# Altium PCB PCB1.PcbDoc
Units mm, origin at the board's own origin, x right, y up, seen from the top; angles counter-clockwise.
Board outline 152.4 x 101.6 mm, 6 copper layers (Top Layer, Signal Layer 1, Signal Layer 2, Signal Layer 3, Signal Layer 4, Bottom Layer), stack 3.691 mm thick; 15 components, 57 nets, 446 pads, 0 vias.
Unrouted connection lines stored in the file: 109.
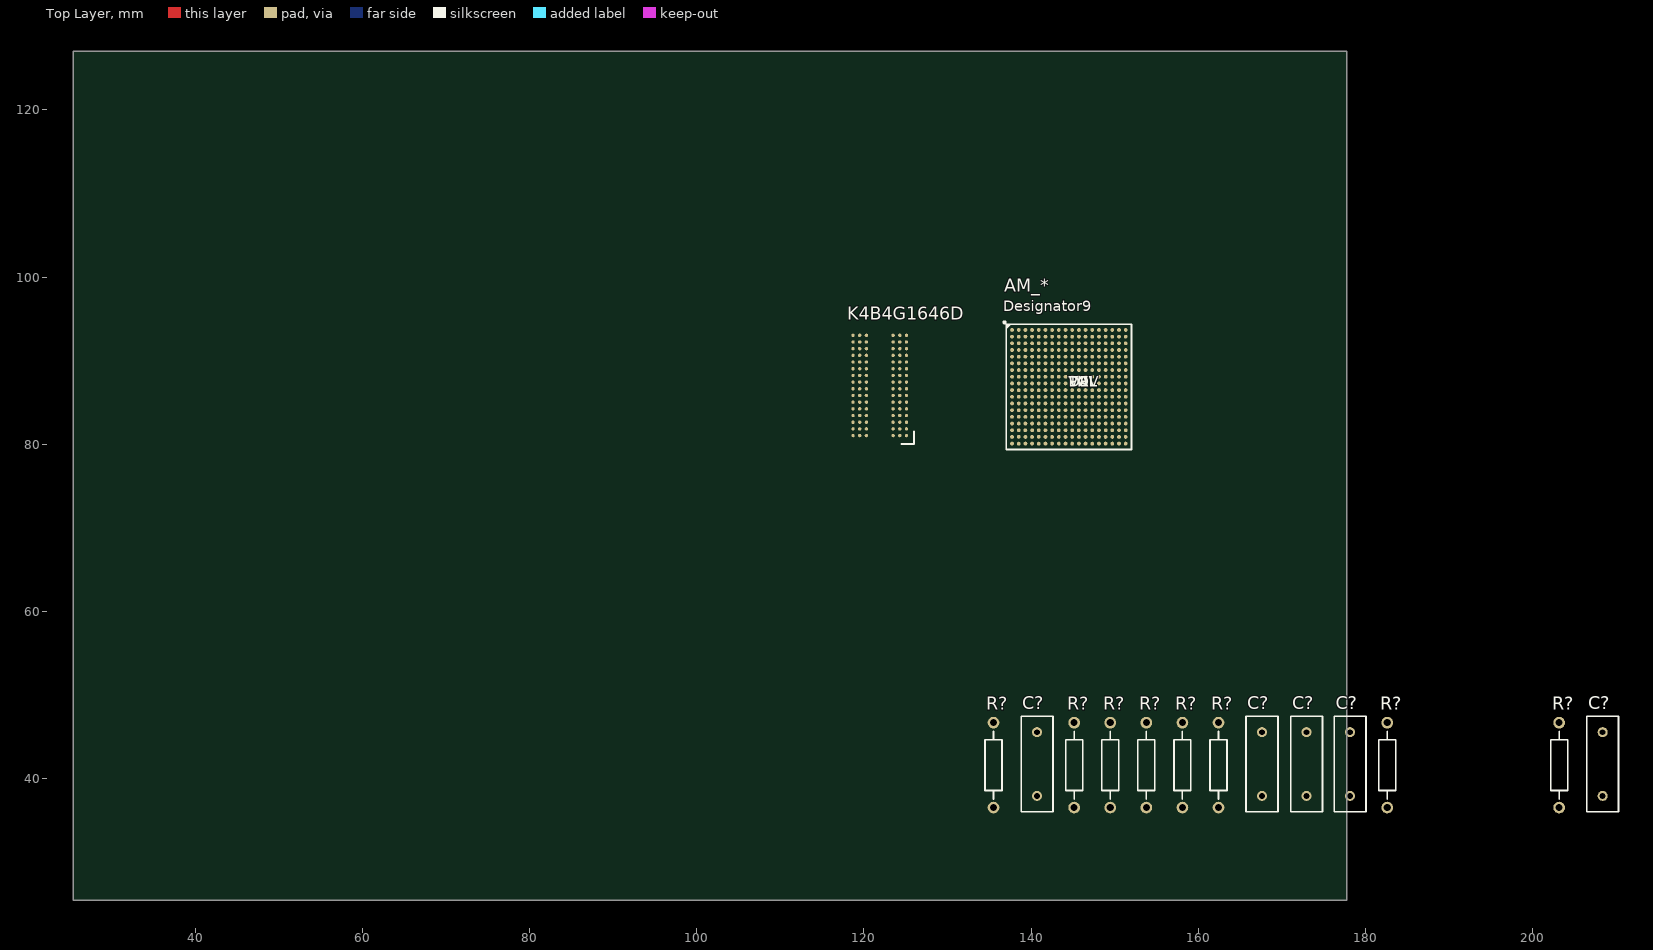
[diagram p0: Top Layer view]
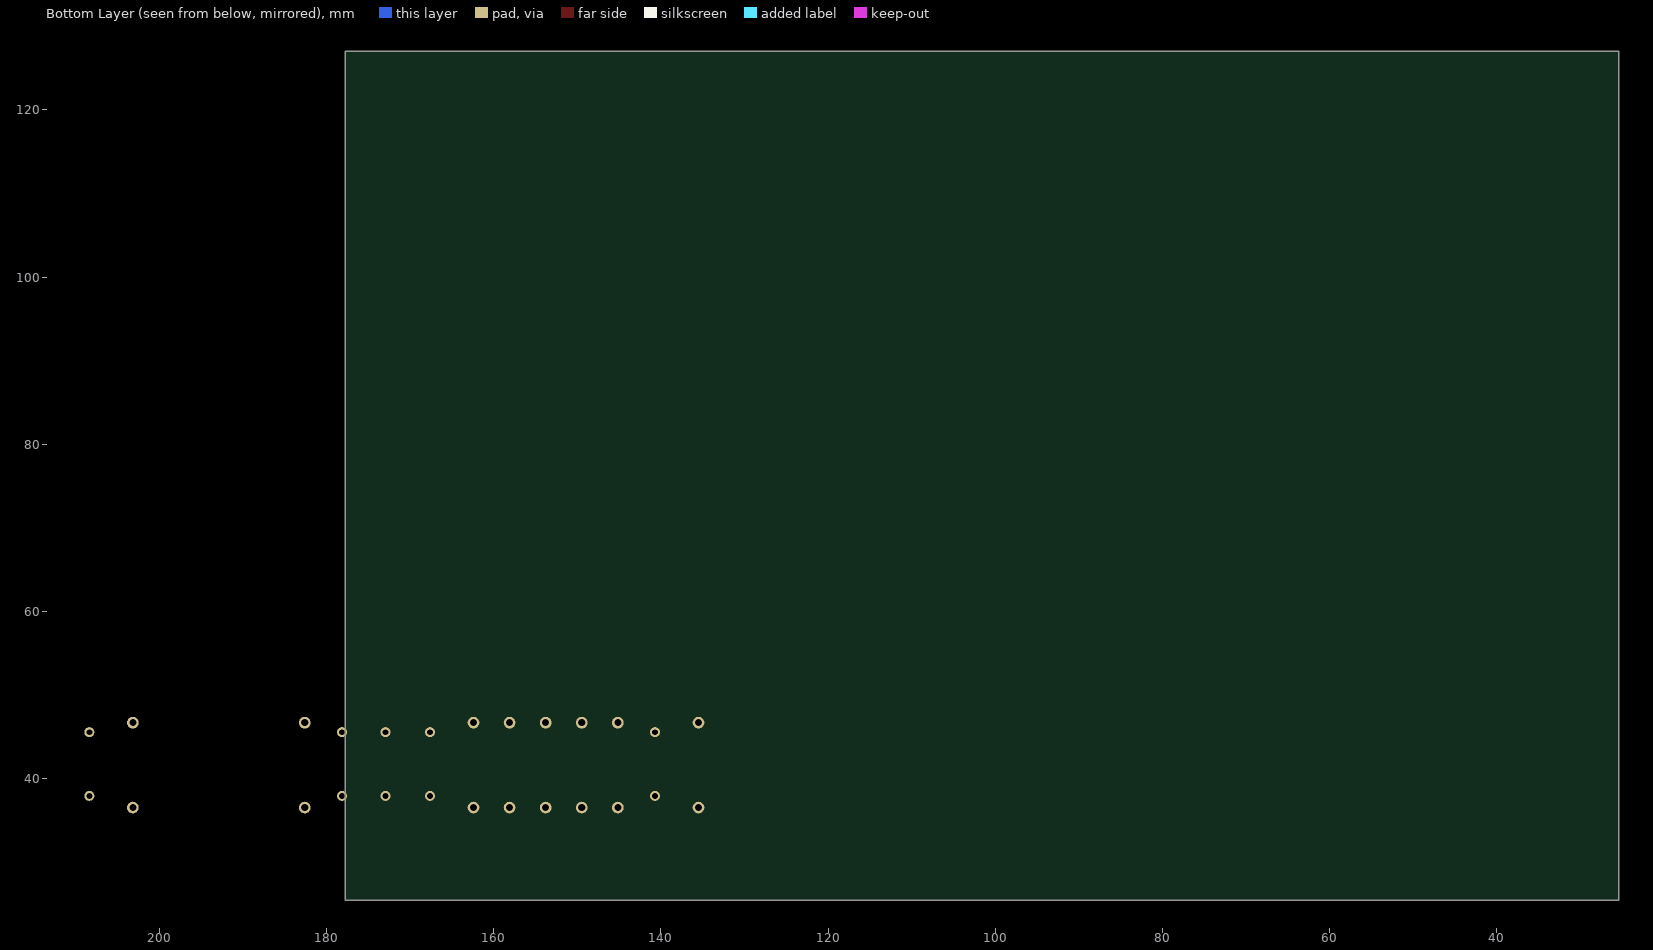
[diagram p1: Bottom Layer view, seen from below]

## Layer stack, top to bottom
Top Solder: solder mask 0.0102, Solder Resist, Dk 3.5
Top Layer: signal copper 0.035
Dielectric 1: prepreg 0.127, Dk 4.2
Signal Layer 1: signal copper 0.035
Dielectric 3: core 1.55, Dk 4.6
Signal Layer 2: signal copper 0.035
Dielectric 4: prepreg 0.127, Dk 4.2
Signal Layer 3: signal copper 0.035
Dielectric 5: core 1.55, Dk 4.6
Signal Layer 4: signal copper 0.035
Dielectric 2: prepreg 0.127, Dk 4.2
Bottom Layer: signal copper 0.035
Bottom Solder: solder mask 0.0102, Solder Resist, Dk 3.5

## Board outline
25.4,25.4 177.8,25.4 177.8,127 25.4,127

## Design rules (kind name [scope] priority, off if disabled: settings)
Clearance [All] p1: gap=0.1
HoleSize [All] p1: absolutevalues=TRUE maxlimit=2.54 minlimit=0.2 maxpercent=80.000 minpercent=20.000
PolygonConnect [All] p1: connectstyle=Relief reliefconductorwidth=0.254 reliefentries=4 polygonreliefangle="90 Angle" airgapwidth=0.254
RoutingVias [All] p1: holewidth=0.711 width=1.27 viastyle="Through Hole" minholewidth=0.2 minwidth=0.4 maxholewidth=0.711 maxwidth=1.27
SolderMaskExpansion [All] p1: expansion=0.102
UnpouredPolygon [All] p1: allowunpoured=FALSE
Width [All] p1: maxlimit=2.54 minlimit=0.1 preferedwidth=0.254
28 further rules are at their usual default settings.

## Classes and differential pairs
component class DDR3: AM_* C? K4B4G1646D R?

## Components (designator, comment, footprint, x,y, rotation, side; value= is the part's Value field where it differs from the comment)
AM_* "AM3352BZCZD80" BGA324C80P18X18_800X1508X1508 144.526,86.868 r0 top
C? "Cap" RAD-0.3 140.716,41.718 r90 top
C? "Cap" RAD-0.3 167.64,41.718 r90 top
C? "Cap" RAD-0.3 178.181,41.718 r90 top
C? "Cap" RAD-0.3 172.974,41.718 r90 top
C? "Cap" RAD-0.3 208.407,41.718 r90 top
K4B4G1646D "K4B4G1646D" CGA96C80P16X6_133X75X11 125.095,81.026 r180 top
R? "Res2" AXIAL-0.4 135.509,41.591 r90 top
R? "Res2" AXIAL-0.4 158.115,41.591 r90 top
R? "Res2" AXIAL-0.4 145.161,41.591 r90 top
R? "Res2" AXIAL-0.4 153.797,41.591 r90 top
R? "Res2" AXIAL-0.4 149.479,41.591 r90 top
R? "Res2" AXIAL-0.4 182.626,41.591 r90 top
R? "Res2" AXIAL-0.4 203.2,41.591 r90 top
R? "Res2" AXIAL-0.4 162.433,41.591 r90 top

## Footprints (in the part's own frame and the unit in brackets; to place one, negate y for a bottom-side part, rotate by r counter-clockwise, add the part's x,y. Pads: shape width x height; smd on the part's side, far side on the other; paste and mask are expansions set on the pad)
AXIAL-0.4 [mm] "Axial Device, Thru-Hole; 2 Leads; 0.4 in Pin Spacing"
  round 1.4 hole 0.85: 1(-5.08,0) 2(5.08,0)
  silkscreen extent -4.06,-1.02 4.06,1.02
BGA324C80P18X18_800X1508X1508 [mm]
  round 0.45 smd paste+0 mask+0.051: A1(-6.8,6.8) A2(-6,6.8) A3(-5.2,6.8) A4(-4.4,6.8) A5(-3.6,6.8) A6(-2.8,6.8) A7(-2,6.8) A8(-1.2,6.8) A9(-0.4,6.8) A10(0.4,6.8) A11(1.2,6.8) A12(2,6.8) A13(2.8,6.8) A14(3.6,6.8) A15(4.4,6.8) A16(5.2,6.8) A17(6,6.8) A18(6.8,6.8) B1(-6.8,6) B2(-6,6) B3(-5.2,6) B4(-4.4,6) B5(-3.6,6) B6(-2.8,6) B7(-2,6) B8(-1.2,6) B9(-0.4,6) B10(0.4,6) B11(1.2,6) B12(2,6) B13(2.8,6) B14(3.6,6) B15(4.4,6) B16(5.2,6) B17(6,6) B18(6.8,6) C1(-6.8,5.2) C2(-6,5.2) C3(-5.2,5.2) C4(-4.4,5.2) C5(-3.6,5.2) C6(-2.8,5.2) C7(-2,5.2) C8(-1.2,5.2) C9(-0.4,5.2) C10(0.4,5.2) C11(1.2,5.2) C12(2,5.2) C13(2.8,5.2) C14(3.6,5.2) C15(4.4,5.2) C16(5.2,5.2) C17(6,5.2) C18(6.8,5.2) D1(-6.8,4.4) D2(-6,4.4) D3(-5.2,4.4) D4(-4.4,4.4) D5(-3.6,4.4) D6(-2.8,4.4) D7(-2,4.4) D8(-1.2,4.4) D9(-0.4,4.4) D10(0.4,4.4) D11(1.2,4.4) D12(2,4.4) D13(2.8,4.4) D14(3.6,4.4) D15(4.4,4.4) D16(5.2,4.4) D17(6,4.4) D18(6.8,4.4) E1(-6.8,3.6) E2(-6,3.6) E3(-5.2,3.6) E4(-4.4,3.6) E5(-3.6,3.6) E6(-2.8,3.6) E7(-2,3.6) E8(-1.2,3.6) E9(-0.4,3.6) E10(0.4,3.6) E11(1.2,3.6) E12(2,3.6) E13(2.8,3.6) E14(3.6,3.6) E15(4.4,3.6) E16(5.2,3.6) E17(6,3.6) E18(6.8,3.6) F1(-6.8,2.8) F2(-6,2.8) F3(-5.2,2.8) F4(-4.4,2.8) F5(-3.6,2.8) F6(-2.8,2.8) F7(-2,2.8) F8(-1.2,2.8) F9(-0.4,2.8) F10(0.4,2.8) F11(1.2,2.8) F12(2,2.8) F13(2.8,2.8) F14(3.6,2.8) F15(4.4,2.8) F16(5.2,2.8) F17(6,2.8) F18(6.8,2.8) G1(-6.8,2) G2(-6,2) G3(-5.2,2) G4(-4.4,2) G5(-3.6,2) G6(-2.8,2) G7(-2,2) G8(-1.2,2) G9(-0.4,2) G10(0.4,2) G11(1.2,2) G12(2,2) G13(2.8,2) G14(3.6,2) G15(4.4,2) G16(5.2,2) G17(6,2) G18(6.8,2) H1(-6.8,1.2) H2(-6,1.2) H3(-5.2,1.2) H4(-4.4,1.2) H5(-3.6,1.2) H6(-2.8,1.2) H7(-2,1.2) H8(-1.2,1.2) H9(-0.4,1.2) H10(0.4,1.2) H11(1.2,1.2) H12(2,1.2) H13(2.8,1.2) H14(3.6,1.2) H15(4.4,1.2) H16(5.2,1.2) H17(6,1.2) H18(6.8,1.2) J1(-6.8,0.4) J2(-6,0.4) J3(-5.2,0.4) J4(-4.4,0.4) J5(-3.6,0.4) J6(-2.8,0.4) J7(-2,0.4) J8(-1.2,0.4) J9(-0.4,0.4) J10(0.4,0.4) J11(1.2,0.4) J12(2,0.4) J13(2.8,0.4) J14(3.6,0.4) J15(4.4,0.4) J16(5.2,0.4) J17(6,0.4) J18(6.8,0.4) K1(-6.8,-0.4) K2(-6,-0.4) K3(-5.2,-0.4) K4(-4.4,-0.4) K5(-3.6,-0.4) K6(-2.8,-0.4) K7(-2,-0.4) K8(-1.2,-0.4) K9(-0.4,-0.4) K10(0.4,-0.4) K11(1.2,-0.4) K12(2,-0.4) K13(2.8,-0.4) K14(3.6,-0.4) K15(4.4,-0.4) K16(5.2,-0.4) K17(6,-0.4) K18(6.8,-0.4) L1(-6.8,-1.2) L2(-6,-1.2) L3(-5.2,-1.2) L4(-4.4,-1.2) L5(-3.6,-1.2) L6(-2.8,-1.2) L7(-2,-1.2) L8(-1.2,-1.2) L9(-0.4,-1.2) L10(0.4,-1.2) L11(1.2,-1.2) L12(2,-1.2) L13(2.8,-1.2) L14(3.6,-1.2) L15(4.4,-1.2) L16(5.2,-1.2) L17(6,-1.2) L18(6.8,-1.2) M1(-6.8,-2) M2(-6,-2) M3(-5.2,-2) M4(-4.4,-2) M5(-3.6,-2) M6(-2.8,-2) M7(-2,-2) M8(-1.2,-2) M9(-0.4,-2) M10(0.4,-2) M11(1.2,-2) M12(2,-2) M13(2.8,-2) M14(3.6,-2) M15(4.4,-2) M16(5.2,-2) M17(6,-2) M18(6.8,-2) N1(-6.8,-2.8) N2(-6,-2.8) N3(-5.2,-2.8) N4(-4.4,-2.8) N5(-3.6,-2.8) N6(-2.8,-2.8) N7(-2,-2.8) N8(-1.2,-2.8) N9(-0.4,-2.8) N10(0.4,-2.8) N11(1.2,-2.8) N12(2,-2.8) N13(2.8,-2.8) N14(3.6,-2.8) N15(4.4,-2.8) N16(5.2,-2.8) N17(6,-2.8) N18(6.8,-2.8) P1(-6.8,-3.6) P2(-6,-3.6) P3(-5.2,-3.6) P4(-4.4,-3.6) P5(-3.6,-3.6) P6(-2.8,-3.6) P7(-2,-3.6) P8(-1.2,-3.6) P9(-0.4,-3.6) P10(0.4,-3.6) P11(1.2,-3.6) P12(2,-3.6) P13(2.8,-3.6) P14(3.6,-3.6) P15(4.4,-3.6) P16(5.2,-3.6) P17(6,-3.6) P18(6.8,-3.6) R1(-6.8,-4.4) R2(-6,-4.4) R3(-5.2,-4.4) R4(-4.4,-4.4) R5(-3.6,-4.4) R6(-2.8,-4.4) R7(-2,-4.4) R8(-1.2,-4.4) R9(-0.4,-4.4) R10(0.4,-4.4) R11(1.2,-4.4) R12(2,-4.4) R13(2.8,-4.4) R14(3.6,-4.4) R15(4.4,-4.4) R16(5.2,-4.4) R17(6,-4.4) R18(6.8,-4.4) T1(-6.8,-5.2) T2(-6,-5.2) T3(-5.2,-5.2) T4(-4.4,-5.2) T5(-3.6,-5.2) T6(-2.8,-5.2) T7(-2,-5.2) T8(-1.2,-5.2) T9(-0.4,-5.2) T10(0.4,-5.2) T11(1.2,-5.2) T12(2,-5.2) T13(2.8,-5.2) T14(3.6,-5.2) T15(4.4,-5.2) T16(5.2,-5.2) T17(6,-5.2) T18(6.8,-5.2) U1(-6.8,-6) U2(-6,-6) U3(-5.2,-6) U4(-4.4,-6) U5(-3.6,-6) U6(-2.8,-6) U7(-2,-6) U8(-1.2,-6) U9(-0.4,-6) U10(0.4,-6) U11(1.2,-6) U12(2,-6) U13(2.8,-6) U14(3.6,-6) U15(4.4,-6) U16(5.2,-6) U17(6,-6) U18(6.8,-6) V1(-6.8,-6.8) V2(-6,-6.8) V3(-5.2,-6.8) V4(-4.4,-6.8) V5(-3.6,-6.8) V6(-2.8,-6.8) V7(-2,-6.8) V8(-1.2,-6.8) V9(-0.4,-6.8) V10(0.4,-6.8) V11(1.2,-6.8) V12(2,-6.8) V13(2.8,-6.8) V14(3.6,-6.8) V15(4.4,-6.8) V16(5.2,-6.8) V17(6,-6.8) V18(6.8,-6.8)
  silkscreen extent -7.82,-7.5 7.5,7.82, body extent 0,0 0.25,0.25, height 0.25
CGA96C80P16X6_133X75X11 [mm]
  round 0.4 smd mask+0.02: A1(0,0) A2(0.8,0) A3(1.6,0) A7(4.8,0) A8(5.6,0) A9(6.4,0) B1(0,-0.8) B2(0.8,-0.8) B3(1.6,-0.8) B7(4.8,-0.8) B8(5.6,-0.8) B9(6.4,-0.8) C1(0,-1.6) C2(0.8,-1.6) C3(1.6,-1.6) C7(4.8,-1.6) C8(5.6,-1.6) C9(6.4,-1.6) D1(0,-2.4) D2(0.8,-2.4) D3(1.6,-2.4) D7(4.8,-2.4) D8(5.6,-2.4) D9(6.4,-2.4) E1(0,-3.2) E2(0.8,-3.2) E3(1.6,-3.2) E7(4.8,-3.2) E8(5.6,-3.2) E9(6.4,-3.2) F1(0,-4) F2(0.8,-4) F3(1.6,-4) F7(4.8,-4) F8(5.6,-4) F9(6.4,-4) G1(0,-4.8) G2(0.8,-4.8) G3(1.6,-4.8) G7(4.8,-4.8) G8(5.6,-4.8) G9(6.4,-4.8) H1(0,-5.6) H2(0.8,-5.6) H3(1.6,-5.6) H7(4.8,-5.6) H8(5.6,-5.6) H9(6.4,-5.6) J1(0,-6.4) J2(0.8,-6.4) J3(1.6,-6.4) J7(4.8,-6.4) J8(5.6,-6.4) J9(6.4,-6.4) K1(0,-7.2) K2(0.8,-7.2) K3(1.6,-7.2) K7(4.8,-7.2) K8(5.6,-7.2) K9(6.4,-7.2) L1(0,-8) L2(0.8,-8) L3(1.6,-8) L7(4.8,-8) L8(5.6,-8) L9(6.4,-8) M1(0,-8.8) M2(0.8,-8.8) M3(1.6,-8.8) M7(4.8,-8.8) M8(5.6,-8.8) M9(6.4,-8.8) N1(0,-9.6) N2(0.8,-9.6) N3(1.6,-9.6) N7(4.8,-9.6) N8(5.6,-9.6) N9(6.4,-9.6) P1(0,-10.4) P2(0.8,-10.4) P3(1.6,-10.4) P7(4.8,-10.4) P8(5.6,-10.4) P9(6.4,-10.4) R1(0,-11.2) R2(0.8,-11.2) R3(1.6,-11.2) R7(4.8,-11.2) R8(5.6,-11.2) R9(6.4,-11.2) T1(0,-12) T2(0.8,-12) T3(1.6,-12) T7(4.8,-12) T8(5.6,-12) T9(6.4,-12)
  silkscreen extent -0.9,-0.5 0.6,1, body extent -0.55,-12.65 6.95,0.65, height 1.2
RAD-0.3 [mm] "Radial Cap, Thru-Hole; 2 Leads; 0.3 in Pin Spacing"
  round 1.2 hole 0.7: 1(-3.81,0) 2(3.81,0)
  silkscreen extent -5.71,-1.91 5.71,1.91

## Part data
AM_*: "Microprocesseur ARM"
C? C? C? C? C?: "Capacitor"
K4B4G1646D: "Mémoire DDR3/SRAM"
R? R? R? R? R? R? R? R?: "Resistor"

## Nets (pads, with @x,y where several pads share a name; then routed paths per layer and width w, separated by ;. In a path a pad name is that pad's centre, name@x,y a point inside that pad or via, vN(x,y) a via of type N, cw(c..) or ccw(c..) an arc to the next point about the centre after c; other vN are vias at no path point)
1.5V: C?.2@167.64,45.528 C?.2@208.407,45.528 K4B4G1646D.A1 K4B4G1646D.A8 K4B4G1646D.B2 K4B4G1646D.C1 K4B4G1646D.C9 K4B4G1646D.D2 K4B4G1646D.D9 K4B4G1646D.E9 K4B4G1646D.F1 K4B4G1646D.G7 K4B4G1646D.H2 K4B4G1646D.H9 K4B4G1646D.K2 K4B4G1646D.K8 K4B4G1646D.N1 K4B4G1646D.N9 K4B4G1646D.R1 K4B4G1646D.R9 R?.2@158.115,46.671 R?.2@203.2,46.671
#CAS: AM_*.F1 K4B4G1646D.K3
#CK: AM_*.D1 K4B4G1646D.K7 R?.1@149.479,36.511
#CS: AM_*.H2 K4B4G1646D.L2
#DQSL: AM_*.P2 K4B4G1646D.G3
#DQSU: AM_*.L2 K4B4G1646D.B7
#RAS: AM_*.G4 K4B4G1646D.J3
#RESET: AM_*.G2 K4B4G1646D.T2 R?.1@158.115,36.511
#WE: AM_*.B2 K4B4G1646D.L3
A0: AM_*.F3
A1: AM_*.H1 K4B4G1646D.P7
A2: AM_*.E4 K4B4G1646D.P3
A3: AM_*.C3 K4B4G1646D.N2
A4: AM_*.C2 K4B4G1646D.P8
A5: AM_*.B1 K4B4G1646D.P2
A6: AM_*.D5 K4B4G1646D.R8
A7: AM_*.E2 K4B4G1646D.R2
A8: AM_*.D4 K4B4G1646D.T8
A9: AM_*.C1 K4B4G1646D.R3
A10: AM_*.F4 K4B4G1646D.L7
A11: AM_*.F2 K4B4G1646D.R7
A12: AM_*.E3 K4B4G1646D.N3
A13: AM_*.H3 K4B4G1646D.T3
A14: AM_*.H4 K4B4G1646D.T7
A15: AM_*.D3 K4B4G1646D.M7
BA0: AM_*.C4 K4B4G1646D.M2
BA1: AM_*.E1 K4B4G1646D.N8
BA2: AM_*.B3 K4B4G1646D.M3
CK: AM_*.D2 K4B4G1646D.J7 R?.1@153.797,36.511
CKE: AM_*.G3 K4B4G1646D.K9 R?.2@145.161,46.671
DML: AM_*.M2 K4B4G1646D.E7
DMU: AM_*.J2 K4B4G1646D.D3
DQ0: AM_*.M3 K4B4G1646D.E3
DQ1: AM_*.M4 K4B4G1646D.F7
DQ2: AM_*.N1 K4B4G1646D.F2
DQ3: AM_*.N2 K4B4G1646D.F8
DQ4: AM_*.N3 K4B4G1646D.H3
DQ5: AM_*.N4 K4B4G1646D.H8
DQ6: AM_*.P3 K4B4G1646D.G2
DQ7: AM_*.P4 K4B4G1646D.H7
DQ8: AM_*.J1 K4B4G1646D.D7
DQ9: AM_*.K1 K4B4G1646D.C3
DQ10: AM_*.K2 K4B4G1646D.C8
DQ11: AM_*.K3 K4B4G1646D.C2
DQ12: AM_*.K4 K4B4G1646D.A7
DQ13: AM_*.L3 K4B4G1646D.A2
DQ14: AM_*.L4 K4B4G1646D.B8
DQ15: AM_*.M1 K4B4G1646D.A3
DQSL: AM_*.P1 K4B4G1646D.F3
DQSU: AM_*.L1 K4B4G1646D.C7
GND: C?.1@140.716,37.908 C?.1@172.974,37.908 C?.1@178.181,37.908 K4B4G1646D.A9 K4B4G1646D.B1 K4B4G1646D.B3 K4B4G1646D.B9 K4B4G1646D.D1 K4B4G1646D.D8 K4B4G1646D.E1 K4B4G1646D.E2 K4B4G1646D.E8 K4B4G1646D.F9 K4B4G1646D.G1 K4B4G1646D.G8 K4B4G1646D.G9 K4B4G1646D.J2 K4B4G1646D.J8 K4B4G1646D.M1 K4B4G1646D.M9 K4B4G1646D.P1 K4B4G1646D.P9 K4B4G1646D.T1 K4B4G1646D.T9 R?.1@135.509,36.511 R?.1@145.161,36.511 R?.1@162.433,36.511 R?.1@182.626,36.511
NetAM_*_J3: AM_*.J3 R?.2@135.509,46.671
NetAM_*_J4: AM_*.J4 C?.2@140.716,45.528
NetC?_1: C?.1@208.407,37.908 C?.2@172.974,45.528
NetC?_2: C?.2@178.181,45.528 K4B4G1646D.H1 K4B4G1646D.M8 R?.1@203.2,36.511 R?.2@182.626,46.671
NetK4B4G1646D_L8: K4B4G1646D.L8 R?.2@162.433,46.671
ODT: AM_*.G1 K4B4G1646D.K1
pads on no net: AM_*.A1 AM_*.A2 AM_*.A3 AM_*.A4 AM_*.A5 AM_*.A6 AM_*.A7 AM_*.A8 AM_*.A9 AM_*.A10 AM_*.A11 AM_*.A12 AM_*.A13 AM_*.A14 AM_*.A15 AM_*.A16 AM_*.A17 AM_*.A18 AM_*.B4 AM_*.B5 AM_*.B6 AM_*.B7 AM_*.B8 AM_*.B9 AM_*.B10 AM_*.B11 AM_*.B12 AM_*.B13 AM_*.B14 AM_*.B15 AM_*.B16 AM_*.B17 AM_*.B18 AM_*.C5 AM_*.C6 AM_*.C7 AM_*.C8 AM_*.C9 AM_*.C10 AM_*.C11 AM_*.C12 AM_*.C13 AM_*.C14 AM_*.C15 AM_*.C16 AM_*.C17 AM_*.C18 AM_*.D6 AM_*.D7 AM_*.D8 AM_*.D9 AM_*.D10 AM_*.D11 AM_*.D12 AM_*.D13 AM_*.D14 AM_*.D15 AM_*.D16 AM_*.D17 AM_*.D18 AM_*.E5 AM_*.E6 AM_*.E7 AM_*.E8 AM_*.E9 AM_*.E10 AM_*.E11 AM_*.E12 AM_*.E13 AM_*.E14 AM_*.E15 AM_*.E16 AM_*.E17 AM_*.E18 AM_*.F5 AM_*.F6 AM_*.F7 AM_*.F8 AM_*.F9 AM_*.F10 AM_*.F11 AM_*.F12 AM_*.F13 AM_*.F14 AM_*.F15 AM_*.F16 AM_*.F17 AM_*.F18 AM_*.G5 AM_*.G6 AM_*.G7 AM_*.G8 AM_*.G9 AM_*.G10 AM_*.G11 AM_*.G12 AM_*.G13 AM_*.G14 AM_*.G15 AM_*.G16 AM_*.G17 AM_*.G18 AM_*.H5 AM_*.H6 AM_*.H7 AM_*.H8 AM_*.H9 AM_*.H10 AM_*.H11 AM_*.H12 AM_*.H13 AM_*.H14 AM_*.H15 AM_*.H16 AM_*.H17 AM_*.H18 AM_*.J5 AM_*.J6 AM_*.J7 AM_*.J8 AM_*.J9 AM_*.J10 AM_*.J11 AM_*.J12 AM_*.J13 AM_*.J14 AM_*.J15 AM_*.J16 AM_*.J17 AM_*.J18 AM_*.K5 AM_*.K6 AM_*.K7 AM_*.K8 AM_*.K9 AM_*.K10 AM_*.K11 AM_*.K12 AM_*.K13 AM_*.K14 AM_*.K15 AM_*.K16 AM_*.K17 AM_*.K18 AM_*.L5 AM_*.L6 AM_*.L7 AM_*.L8 AM_*.L9 AM_*.L10 AM_*.L11 AM_*.L12 AM_*.L13 AM_*.L14 AM_*.L15 AM_*.L16 AM_*.L17 AM_*.L18 AM_*.M5 AM_*.M6 AM_*.M7 AM_*.M8 AM_*.M9 AM_*.M10 AM_*.M11 AM_*.M12 AM_*.M13 AM_*.M14 AM_*.M15 AM_*.M16 AM_*.M17 AM_*.M18 AM_*.N5 AM_*.N6 AM_*.N7 AM_*.N8 AM_*.N9 AM_*.N10 AM_*.N11 AM_*.N12 AM_*.N13 AM_*.N14 AM_*.N15 AM_*.N16 AM_*.N17 AM_*.N18 AM_*.P5 AM_*.P6 AM_*.P7 AM_*.P8 AM_*.P9 AM_*.P10 AM_*.P11 AM_*.P12 AM_*.P13 AM_*.P14 AM_*.P15 AM_*.P16 AM_*.P17 AM_*.P18 AM_*.R1 AM_*.R2 AM_*.R3 AM_*.R4 AM_*.R5 AM_*.R6 AM_*.R7 AM_*.R8 AM_*.R9 AM_*.R10 AM_*.R11 AM_*.R12 AM_*.R13 AM_*.R14 AM_*.R15 AM_*.R16 AM_*.R17 AM_*.R18 AM_*.T1 AM_*.T2 AM_*.T3 AM_*.T4 AM_*.T5 AM_*.T6 AM_*.T7 AM_*.T8 AM_*.T9 AM_*.T10 AM_*.T11 AM_*.T12 AM_*.T13 AM_*.T14 AM_*.T15 AM_*.T16 AM_*.T17 AM_*.T18 AM_*.U1 AM_*.U2 AM_*.U3 AM_*.U4 AM_*.U5 AM_*.U6 AM_*.U7 AM_*.U8 AM_*.U9 AM_*.U10 AM_*.U11 AM_*.U12 AM_*.U13 AM_*.U14 AM_*.U15 AM_*.U16 AM_*.U17 AM_*.U18 AM_*.V1 AM_*.V2 AM_*.V3 AM_*.V4 AM_*.V5 AM_*.V6 AM_*.V7 AM_*.V8 AM_*.V9 AM_*.V10 AM_*.V11 AM_*.V12 AM_*.V13 AM_*.V14 AM_*.V15 AM_*.V16 AM_*.V17 AM_*.V18 C?.1@167.64,37.908 K4B4G1646D.J1 K4B4G1646D.J9 K4B4G1646D.L1 K4B4G1646D.L9 K4B4G1646D.N7 R?.2@149.479,46.671 R?.2@153.797,46.671

## Text inside footprints (layer, text, board x,y; h text height)
AM_*: Top Overlay "Designator9" at 136.677,95.91 h1.27; Top Overlay "TOL" at 144.526,86.868 h1.27; Top Overlay "VAL" at 144.526,86.868 h1.27; Top Overlay "PN" at 144.526,86.868 h1.27; Top Overlay "DEV" at 144.526,86.868 h1.27